# Altium PCB vehicle.PcbDoc
Units mm, origin at the board's own origin, x right, y up, seen from the top; angles counter-clockwise.
Board outline 152.4 x 101.6 mm, 2 copper layers (Top Layer, Bottom Layer); 26 components, 32 nets, 144 pads, 21 vias.
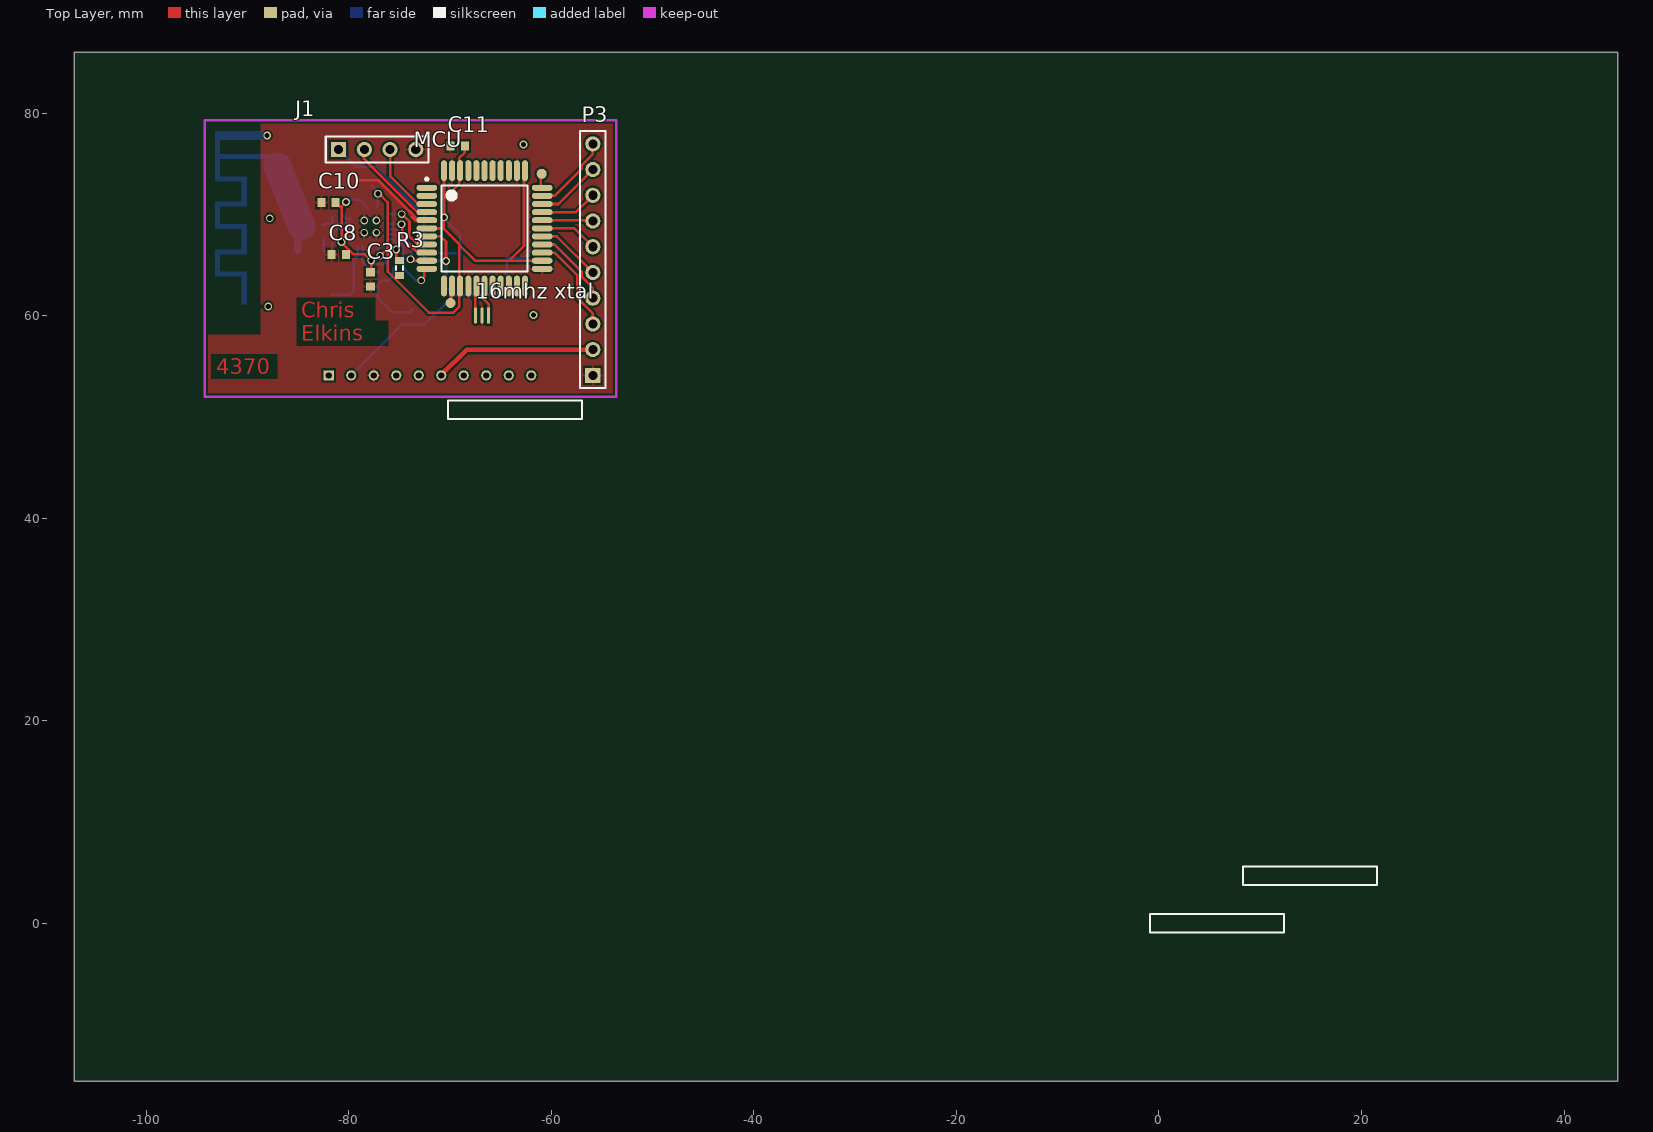
[diagram p0: Top Layer view]
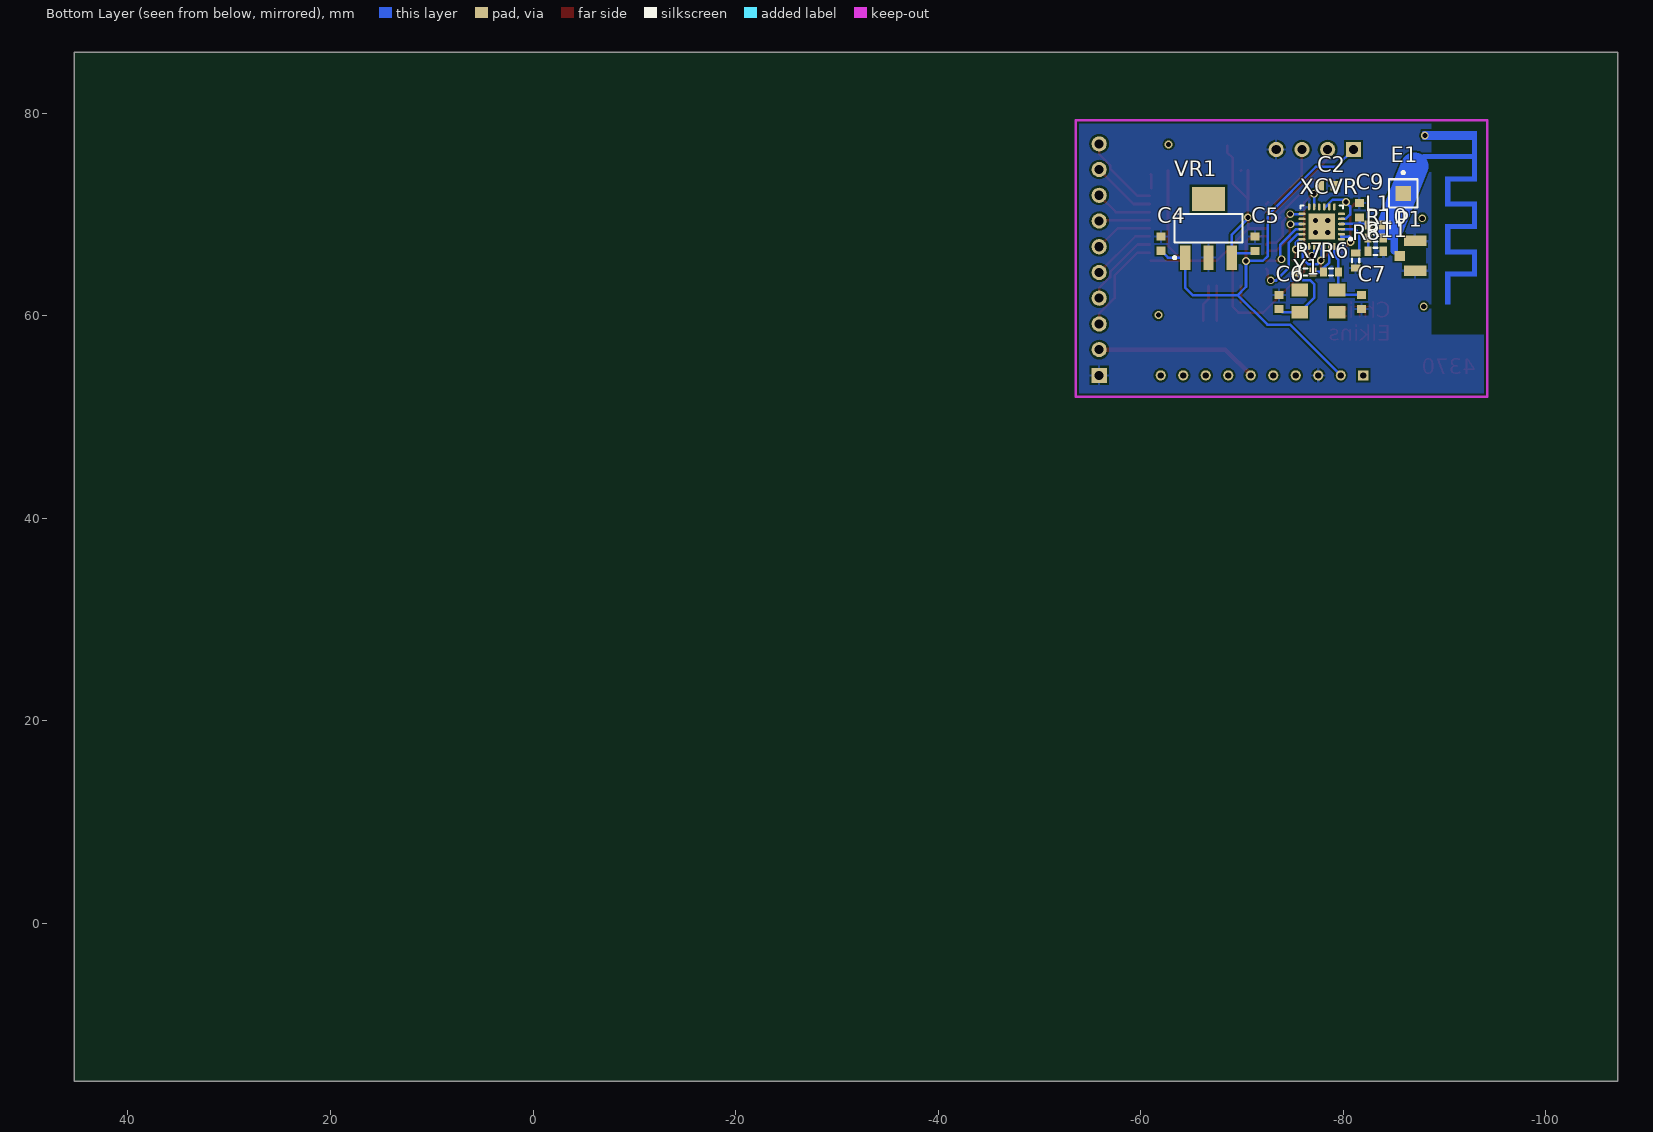
[diagram p1: Bottom Layer view, seen from below]

## Layer stack, top to bottom
Top Layer: signal copper 0.0356
Dielectric: dielectric 0.32, FR-4, Dk 4.8
Bottom Layer: signal copper 0.0356

## Board outline
-107.1,-15.6 45.3,-15.6 45.3,86 -107.1,86

## Design rules (kind name [scope] priority, off if disabled: settings)
Clearance [All] p1: gap=0.2
PolygonConnect [All] p1: connectstyle=Relief reliefconductorwidth=0.254 reliefentries=4 polygonreliefangle="90 Angle"
RoomDefinition vehicle [InComponentClass('vehicle')] p1: confinementstyle=ConfineOut formatcopy=TRUE lockcomponents=FALSE outline 51,-11 55,-11 55,6 51,6
RoutingVias [All] p1: holewidth=0.711 width=1.27 viastyle="Through Hole" minholewidth=0.711 minwidth=1.27 maxholewidth=0.711 maxwidth=1.27
SilkscreenOverComponentPads [All] p1: minsilkscreentomaskgap=0.254
SolderMaskExpansion [All] p1: expansion=0.102
Width [All] p1: maxlimit=5 minlimit=0.254 preferedwidth=0.254
27 further rules are at their usual default settings.

## Components (designator, comment, footprint, x,y, rotation, side; value= is the part's Value field where it differs from the comment)
"16mhz xtal" "NCSTCE16M0V53-R0" OSC -66.188,60 r180 top
C2 "Cap Semi" CAPC1608L -78.42,72.82 r0 bottom
C3 "Cap Semi" CAPC1608L -77.86,63.58 r90 top
C4 "Cap Semi" CAPC1608L -62,67.1 r270 bottom
C5 "Cap Semi" CAPC1608L -71.268,67.096 r270 bottom
C6 "Cap Semi" CAPC1608L -73.668,61.342 r270 bottom
C7 "Cap Semi" CAPC1608L -81.796,61.342 r90 bottom
C8 "Cap Semi" CAPC1608L -80.988,66.03 r0 top
C9 "Cap Semi" CAPC1608L -81.6,70.4 r90 bottom
C10 "Cap Semi" CAPC1608L -81.99,71.16 r180 top
C11 "Cap Semi" CAPC1608L -69.236,76.748 r180 top
E1 "Antenna" PIN1 -85.922,72.065 r180 bottom
J1 "5000750517" HDR1X4 -81,76.4 r0 top
L1 "Inductor" INDC1608L -83.2,68.95 r0 bottom
MCU "ATMega32u4" TQFP44_M -66.596,68.62 r0 top
P1 "u.fl" "U.FL connector" -87.1,65.9 r270 bottom
P3 "Header 10" HDR1X10 -55.9,54.1 r90 top
R3 "Res3" RESC1608L -75,64.7 r270 top
R6 "Res3" RESC1608L -78.798,64.308 r180 bottom
R7 "Res3" RESC1608L -76.258,64.308 r180 bottom
R8 "Res3" RESC1608L -81.23,65.44 r90 bottom
R10 "Res3" RESC1608L -83.2,67.65 r180 bottom
R11 "Res3" RESC1608L -83.2,66.35 r180 bottom
VR1 "NCP1117ST33T3G" SOT223-4N -66.696,68.62 r90 bottom
XCVR "CYRF8935" QFN50P400X400-24VAL -77.872,68.794 r0 bottom
Y1 "XTAL" PCBComponent_1 -75.7,60.326 r180 bottom

## Footprints (in the part's own frame and the unit in brackets; to place one, negate y for a bottom-side part, rotate by r counter-clockwise, add the part's x,y. Pads: shape width x height; smd on the part's side, far side on the other; paste and mask are expansions set on the pad)
CAPC1608L [mm] "Chip Capacitor, Body 1.6x0.8mm, IPC High Density"
  rect 0.8x0.9 smd: 1(-0.7,0) 2(0.7,0)
  body extent -0.87,-0.48 0.87,0.48, height 1.3
HDR1X4 [mm] "Connector; Header; 4 Position"
  rect 1.5x1.5 hole 0.9: 1(0,0)
  round 1.5 hole 0.9: 2(2.54,0) 3(5.08,0) 4(7.62,0)
  silkscreen extent -1.27,-1.27 8.89,1.27
HDR1X10 [mm] "Connector; Header; 10 Position"
  rect 1.5x1.5 hole 0.9: 1(0,0)
  round 1.5 hole 0.9: 2(2.54,0) 3(5.08,0) 4(7.62,0) 5(10.16,0) 6(12.7,0) 7(15.24,0) 8(17.78,0) 9(20.32,0) 10(22.86,0)
  silkscreen extent -1.27,-1.27 24.13,1.27
INDC1608L [mm] "Chip Inductor, Body 1.6x0.8mm, IPC High Density"
  rect 0.8x0.9 smd: 1(-0.7,0) 2(0.7,0)
  silkscreen extent -1.4,-0.35 -1.4,0.35, body extent -0.87,-0.48 0.87,0.48, height 0.55
OSC [mm]
  rect 0.3x1.6 smd: 1(0,0)
  oval 0.3x1.6 smd: 2(0.65,0) 3(1.3,0)
PCBComponent_1 [mm]
  rect 1.6x1.25 smd: 1(0,0) 2(3.7,2.2) 3(0,2.2) 3(3.7,0)
PIN1 [mm] "Generic Antenna; 1 Lead"
  rect 1.5x1.5 smd: 1(0,0)
  silkscreen extent -1.4,-1.4 1.4,2.17
QFN50P400X400-24VAL [mm] "24-Pin Plastic Quad Flat No-Lead 0.5 mm Pitch"
  oval 0.7x0.25 smd: 1(-1.95,1.25) 2(-1.95,0.75) 3(-1.95,0.25) 4(-1.95,-0.25) 5(-1.95,-0.75) 6(-1.95,-1.25) 13(1.95,-1.25) 14(1.95,-0.75) 15(1.95,-0.25) 16(1.95,0.25) 17(1.95,0.75) 18(1.95,1.25)
  oval 0.25x0.7 smd: 7(-1.25,-1.95) 8(-0.75,-1.95) 9(-0.25,-1.95) 10(0.25,-1.95) 11(0.75,-1.95) 12(1.25,-1.95) 19(1.25,1.95) 20(0.75,1.95) 21(0.25,1.95) 22(-0.25,1.95) 23(-0.75,1.95) 24(-1.25,1.95)
  rect 2.6x2.6 smd: 25(0,0)
  silkscreen extent -2.97,-2.1 2.1,2.1, body extent -2.07,-2.07 2.07,2.07, height 1
RESC1608L [mm] "Chip Resistor, Body 1.6x0.8mm, IPC High Density"
  rect 0.7x0.9 smd: 1(-0.75,0) 2(0.75,0)
  silkscreen extent -0.2,-0.35 0.2,0.35, body extent -0.85,-0.48 0.85,0.48, height 0.9
SOT223-4N [mm] "SOT223, 4-Leads, Body 6.5x3.5mm, Pitch 2.3mm, Lead Span 7mm, IPC Medium Density"
  rect 2.4x1 smd: 1(-2.9,2.3) 2(-2.9,0) 3(-2.9,-2.3)
  rect 2.4x3.3 smd: 4(2.9,0)
  silkscreen extent -3.02,-3.35 1.4,3.48, body extent -1.85,-3.35 1.85,3.35, height 1.7
TQFP44_M [mm] "Thin QFP, 44-Leads, Body 10x10mm, Pitch 0.8mm, IPC Low Density"
  oval 2.05x0.6 smd: 1(-5.7,4) 2(-5.7,3.2) 3(-5.7,2.4) 4(-5.7,1.6) 5(-5.7,0.8) 6(-5.7,0) 7(-5.7,-0.8) 8(-5.7,-1.6) 9(-5.7,-2.4) 10(-5.7,-3.2) 11(-5.7,-4) 23(5.7,-4) 24(5.7,-3.2) 25(5.7,-2.4) 26(5.7,-1.6) 27(5.7,-0.8) 28(5.7,0) 29(5.7,0.8) 30(5.7,1.6) 31(5.7,2.4) 32(5.7,3.2) 33(5.7,4)
  oval 0.6x2.05 smd: 12(-4,-5.7) 13(-3.2,-5.7) 14(-2.4,-5.7) 15(-1.6,-5.7) 16(-0.8,-5.7) 17(0,-5.7) 18(0.8,-5.7) 19(1.6,-5.7) 20(2.4,-5.7) 21(3.2,-5.7) 22(4,-5.7) 34(4,5.7) 35(3.2,5.7) 36(2.4,5.7) 37(1.6,5.7) 38(0.8,5.7) 39(0,5.7) 40(-0.8,5.7) 41(-1.6,5.7) 42(-2.4,5.7) 43(-3.2,5.7) 44(-4,5.7)
  silkscreen extent -5.82,-4.25 4.25,4.97, body extent -5,-5 5,5, height 1.6
"U.FL connector" [mm] "u.fl smd connector"
  rect 1x1.05 smd: 1(0,-1.525)
  rect 1.05x2.2 smd: 2(-1.475,0) 2(1.475,0)

## Part data
C2 C3 C4 C5 C6 C7 C8 C9 C10 C11: "Capacitor (Semiconductor SIM Model)"
E1: "Generic Antenna"
J1: "USB On-The-Go (OTG) Mini-B Receptacle, Right Angle, Thru-Hole, 0.80mm (.031\") Pitch, Solder Tails & Shell Tabs with Dimples"
MCU: "usb enabled avr microcontroller"
P1: library part BNC, "BNC Elbow Connector"
P3: "Header, 10-Pin"
R3 R6 R7 R8 R10 R11: "Resistor"
VR1: library part "Volt Reg", "Voltage Regulator"
Y1: "Crystal Oscillator"

## Free pads (board coordinates)
  rect 1x1 hole 0.6: 1(-81.978,54.1)
  round 1 smd: 1(-69.95,61.25) 1(-60.95,74)
  round 1 hole 0.6: 2(-79.756,54.1) 3(-77.533,54.1) 4(-75.311,54.1) 5(-73.089,54.1) 6(-70.867,54.1) 7(-68.644,54.1) 8(-66.422,54.1) 9(-64.2,54.1) 10(-61.978,54.1)

## Via types
v1: diameter 0.762, hole 0.508, Top Layer to Bottom Layer, 17 vias
v2: diameter 0.762, hole 0.508, Top Layer to Bottom Layer, tented top, 4 vias

## Nets (pads, with @x,y where several pads share a name; then routed paths per layer and width w, separated by ;. In a path a pad name is that pad's centre, name@x,y a point inside that pad or via, vN(x,y) a via of type N, cw(c..) or ccw(c..) an arc to the next point about the centre after c; other vN are vias at no path point)
GND: "16mhz xtal.2" C2.1 C3.1 C4.1 C5.1 C6.1 C7.1 C8.1 C9.2 C10.2 C11.2 J1.4 MCU.5 MCU.15 MCU.23 MCU.35 MCU.43 P1.2 P3.1 pad.3 R8.1 R11.2 VR1.2 XCVR.12 XCVR.25 | length 10
  Top Layer w0.254: -78.96,73.35 -77.04,73.35 -74.387,70.697 -74.387,70.639 -74.062,70.313 -73.983,70.313 -73.648,69.978 -73.648,69.96 -73.088,69.4 MCU.5@-72.46,69.4 ; -73.77,69.73 -73.41,69.37 MCU.5@-73.14,69.37 ; -73.281,69.593 -72.569,69.593 MCU.5@-72.396,69.42 ; MCU.43@-69.936,74.36 MCU.43@-69.896,74.32
  other v2: -78.472,68.194 -77.272,68.194 -78.472,69.394 -77.272,69.394
"Net16mhz xtal_1": "16mhz xtal.1" MCU.17 | length 3.7
  Top Layer w0.254: MCU.17@-66.696,62.92 -66.696,61.646 -66.188,61.138 -66.188,59.476
"Net16mhz xtal_3": "16mhz xtal.3" MCU.16 | length 3.4
  Top Layer w0.254: -67.496,59.484 MCU.16@-67.496,62.92
NetC6_2: C6.2 R7.1 Y1.1 | length 8.2
  Bottom Layer w0.254: R7.1@-75.552,64.698 -75.552,64.448 -75.6,64.4 -75.6,63.9 -76,63.5 -76.7,63.5 -77.15,63.05 -77.15,61.776 Y1.1 -73.984,60.326 C6.2
NetC7_2: C7.2 R6.2 XCVR.24 Y1.2 | length 7
  Bottom Layer w0.254: C7.2 -79.884,62.042 -79.498,62.428 -79.498,64.698 -79.498,65.552 -79.122,65.928 XCVR.24
NetC9_1: C9.1 L1.2 XCVR.4 | length 3.3
  Bottom Layer w0.254: L1.2 -82.4,69.05 XCVR.4@-79.828,69.05 ; -81.65,69.148 C9.1@-81.65,69.75
NetE1_1: E1.1 L1.1 P1.1 R10.2 | length 9.8
  Bottom Layer w0.254: R10.2@-83.9,67.7 L1.1
  Bottom Layer w0.754: -85.05,66.4 -85.05,68.6
  Bottom Layer w2.743: -87.032,74.739 -84.66,68.83
NetJ1_2: J1.2 MCU.4 | length 9.7
  Top Layer w0.254: J1.2@-78.5,76.7 -78.5,75.5 -77.643,74.643 -77.643,74.623 -73.941,70.921 -73.941,70.911 ; -73.91,70.89 MCU.4@-73.077,70.057 ; MCU.4@-73.108,70.078 MCU.4@-73.108,70.22 ; MCU.4@-73.057,70.22 MCU.4@-72.396,70.22
NetJ1_3: J1.3 MCU.3 | length 6.7
  Top Layer w0.254: J1.3@-75.9,76.4 -75.9,73.73 MCU.3@-73.23,71.06 ; MCU.3@-72.569,71.193 MCU.3@-72.396,71.02
NetMCU_8: MCU.8 XCVR.13 | length 5.7
  Top Layer w0.254: v1@-74.765,70.035 -74.004,69.274 -74.004,68.554 -74.01,68.548 -74.01,67.822 -73.381,67.193 -72.569,67.193 MCU.8@-72.396,67.02
  Bottom Layer w0.254: XCVR.13@-75.98,70.02 v1(-74.77,70.02)
NetMCU_9: MCU.9 XCVR.15 | length 5.4
  Top Layer w0.254: v1@-74.7,68.95 -74.7,67.712 -73.381,66.393 -72.569,66.393 MCU.9@-72.396,66.22
  Bottom Layer w0.254: XCVR.15 -74.794,69.044 v1@-74.7,68.95
  other v1: -74.8,69.02
NetMCU_10: MCU.10 XCVR.16 | length 6.6
  Top Layer w0.254: v1(-73.892,65.562) -73.958,65.562 -73.958,65.39 -73.81,65.39 -73.8,65.4 MCU.10@-72.416,65.4
  Bottom Layer w0.254: XCVR.16 -75.334,68.544 -73.8,67.01 -73.8,65.4 -73.81,65.39 -73.958,65.39 -73.958,65.562 v1(-73.892,65.562)
NetMCU_11: MCU.11 XCVR.17 | length 7.7
  Top Layer w0.254: v1@-72.87,63.47 -72.54,63.8 -72.54,64.476 MCU.11@-72.396,64.62
  Bottom Layer w0.254: XCVR.17 -75.484,68.044 -74.6,67.16 -74.6,64.7 -73.37,63.47 v1@-72.9,63.47
  other v1: -72.84,63.48
NetMCU_25: MCU.25 P3.3 | length 9.8
  Top Layer w0.254: MCU.25 -59.7,66.22 -57.431,63.951 -57.431,61.728 -55.9,60.197 P3.3
NetMCU_26: MCU.26 P3.4 | length 8.1
  Top Layer w0.254: MCU.26 -59.7,67.02 -56.977,64.297 -56.977,63.814 -55.9,62.737 P3.4
NetMCU_27: MCU.27 P3.5 | length 6.5
  Top Layer w0.254: MCU.27 -59.46,67.82 P3.5
NetMCU_28: MCU.28 P3.6 | length 5.7
  Top Layer w0.254: MCU.28 -57.72,68.62 P3.6
NetMCU_29: MCU.29 P3.7 | length 5
  Top Layer w0.254: MCU.29 -55.98,69.42 P3.7
NetMCU_30: MCU.30 P3.8 | length 5.7
  Top Layer w0.254: MCU.30 -57.56,70.22 P3.8
NetMCU_31: MCU.31 P3.9 | length 6.4
  Top Layer w0.254: MCU.31 -59.3,71.02 P3.9
NetMCU_32: MCU.32 P3.10 | length 7.9
  Top Layer w0.254: MCU.32 -59.7,71.82 -56.977,74.543 -56.977,74.866 -55.9,75.943 P3.10
NetP2_1: pad.1@-81.978,54.1
NetR3_1: R3.1 XCVR.18 | length 2.6
  Top Layer w0.254: v1@-75.3,66.51 -75.3,65.75 R3.1
  Bottom Layer w0.254: XCVR.18 -75.694,67.544 -75.3,67.15 -75.32,67.13 v1(-75.32,66.52)
NetR6_1: R6.1 R7.2 XCVR.23 | length 3.5
  Bottom Layer w0.254: XCVR.23 -78.622,65.262 -78.058,64.698 R6.1@-77.998,64.698 ; R6.1 R7.2
NetR8_2: R8.2 XCVR.3 | length 3.9
  Bottom Layer w0.254: R8.2@-81.37,66.2 -81.56,66.39 -81.56,68.13 -81.146,68.544 XCVR.3
NetR10_1: R10.1 R11.1 | length 1.3
  Bottom Layer w0.254: R11.1 R10.1
NewNet1: 
NewNet2: 
VBAT: P3.2 pad.6 | length 16.1
  Top Layer w0.454: pad.6@-70.9,54.1 -68.36,56.64 P3.2
VCC: C2.2 C5.2 C11.1 MCU.6 MCU.14 MCU.24 MCU.34 MCU.42 MCU.44 R3.2 VR1.3 XCVR.11 XCVR.20 | length 67
  Top Layer w0.254: v1@-77.03,72.05 -76.15,71.17 -76.15,64.35 -72.1,60.3 -69.65,60.3 -69.096,60.854 -69.096,67.056 -70.66,68.62 ; v1@-76.88,65.91 -76.135,66.655 ; MCU.6@-72.396,68.62 -72.376,68.6 -70.61,68.6 v1@-70.61,69.614 ; -70.596,71.51 MCU.44@-70.596,74.34 ; v1@-70.59,69.806 -70.59,71.51 -69.096,73.004 -69.096,75.554 -68.536,76.114 C11.1 ; -69.096,66.996 -67.52,65.42 -64.15,65.42 ; MCU.34@-62.696,74.32 -62.696,66.874 -64.15,65.42 ; MCU.24@-60.996,65.42 -64.15,65.42
  Bottom Layer w0.254: C2.2 v1@-77.25,72.35 ; -77.13,71.42 v1@-77.13,71.88 ; v1@-77.122,66.072 XCVR.20 ; XCVR.11 -77.122,71.412 ; C5.2@-71.022,66.15 VR1.3@-69.426,66.15 ; v1@-70.696,69.7 -68.996,68 VR1.3
  other v1: -76.903,65.913 -70.58,69.7 -77.11,72.03
VDD: C3.2 C8.2 C10.1 XCVR.1 XCVR.2 XCVR.5 XCVR.8 XCVR.9 XCVR.19 XCVR.21 XCVR.22 | length 22.2
  Top Layer w0.254: C10.1@-81.11,71.03 -80.71,70.63 -80.71,67.21 -79.55,66.05 -78.43,66.05 -77.78,65.42 C3.2@-77.78,64.26 ; -80.74,70.74 v1(-80.27,71.21) ; C8.2 C8.2@-79.909,66.409
  Bottom Layer w0.254: -79.85,67.8 -79.822,67.772 XCVR.2 ; XCVR.5 -80.244,69.544 -80.68,69.98 -80.68,70.77 -80,71.45 -78.964,71.45 XCVR.9@-78.132,70.618 ; XCVR.22 -77.87,66.844 ; -77.87,66.85 -77.87,66.844 ; -77.85,66.85 -77.856,66.844 -77.87,66.844 ; v1@-77.79,65.38 -77.87,65.46 -77.87,66.844 ; v1@-77.73,65.44 -77.73,65.35 -77.465,65.085 -76.534,65.085 -76.002,65.617 -76.002,66.201 -76.028,66.227 -76.028,66.229 -76.417,66.618 -76.567,66.618 -76.5,66.685 -76.5,66.722 XCVR.19
  Bottom Layer w0.264: v1(-80.71,67.26) -80.71,67.69 -80.58,67.82 ; -80.6,67.8 -79.85,67.8
  other v1: -77.79,65.44
VUSB: C4.2 J1.1 MCU.7 pad.2 VR1.1 | length 49.9
  Top Layer w0.254: MCU.7@-72.396,67.82 MCU.7 -70.92,67.82 -70.4,67.3 v1(-70.4,65.4)
  Bottom Layer w0.254: J1.1 -79.3,74.7 -77.3,74.7 -72.55,69.95 -72.55,65.9 -72.05,65.4 v1(-70.4,65.4) -70.4,62.85 -69.55,62 -65.15,62 -64.396,62.754 VR1.1 -62.68,65.72 C4.2 ; pad.2 -74.756,59.1 -72.5,59.1 -69.6,62
pads on no net: MCU.1 MCU.2 MCU.12 MCU.13 MCU.18 MCU.19 MCU.20 MCU.21 MCU.22 MCU.33 MCU.36 MCU.37 MCU.38 MCU.39 MCU.40 MCU.41 VR1.4 XCVR.6 XCVR.7 XCVR.10 XCVR.14 Y1.3
copper on no net: | length 3
  Top Layer w0.254: -69.9,61.3 -69.9,62.95 ; -61.05,72.6 -61.05,73.9 -61,73.95
  other v1: -61.75,60.05 -87.95,60.9 -87.8,69.6 -62.75,76.9 -88.06,77.78

## Polygon pours and split planes (outlines as drawn)
GND on Bottom Layer "Top Layer-No Net" (solid, remove dead copper, pour order 1000): -48.4,80.49 -48.4,51.198 -49.774,49.776 -49.848,49.7 -96.56,49.7 -96.56,79.703 -95.873,80.414
GND on Top Layer "Top Layer-No Net" (solid, remove dead copper, pour order 1001): -47.8,43.4 -49.667,45.773 -49.667,80.47 -93.905,80.47 -95.59,78.328 -94.523,76.973 -94.523,44.679

## Keep-outs
Keep-Out Layer:
  lines w0.254: -94.2,52 -94.2,79.3 -53.6,79.3 -53.6,52 -94.2,52

## Other copper
Top Layer:
  text "Chris" at -84.7,59.8 h1.52
  text "Elkins" at -84.7,57.5 h1.52
  text "4370" at -93.1,54.2 h1.52
Bottom Layer:
  region net NetE1_1: -93.21,66.55 -93.21,63.85 -92.71,63.85 -92.71,66.55
  region net NetE1_1: -93.21,71.25 -93.21,68.55 -92.71,68.55 -92.71,71.25
  region net NetE1_1: -92.93,69.05 -92.93,68.55 -90.07,68.55 -90.07,69.05
  region net NetE1_1: -93.04,71.25 -93.04,70.75 -90.07,70.75 -90.07,71.25
  region net NetE1_1: -92.86,66.55 -92.86,66.05 -90.07,66.05 -90.07,66.55
  region net NetE1_1: -90.57,68.75 -90.57,66.35 -90.07,66.35 -90.07,68.75
  region net NetE1_1: -90.57,73.52 -90.57,71.02 -90.07,71.02 -90.07,73.52
  region net NetE1_1: -92.9,73.75 -92.9,73.25 -90.07,73.25 -90.07,73.75
  region net NetE1_1: -93.21,78.25 -93.21,73.25 -92.71,73.25 -92.71,78.25
  region net NetE1_1: -92.78,78.25 -92.78,77.35 -87.81,77.35 -87.81,78.25
  region net NetE1_1: -92.92,75.95 -92.92,75.45 -87.81,75.45 -87.81,75.95
  region net NetE1_1: -92.94,64.35 -92.94,63.85 -90.07,63.85 -90.07,64.35
  region net NetE1_1: -90.57,64.07 -90.57,61.09 -90.07,61.09 -90.07,64.07
  pour cut-out: -88.2,64.4 -88.2,67.4 -86,67.4 -86,64.4
Multi-Layer:
  pour cut-out: -88.7,79.15 -88.7,58.1 -94.2,58.1 -94.2,79.15

## Silkscreen, mask and mechanical layers (free items; w line width, h text height)
Top Overlay:
  lines w0.2: -70.2,49.8 -70.2,51.6 -56.97,51.6 -56.97,49.8 -70.2,49.8 ; -0.9,-0.9 12.33,-0.9 12.33,0.9 -0.9,0.9 -0.9,-0.9 ; 8.3,3.8 21.53,3.8 21.53,5.6 8.3,5.6 8.3,3.8
Top Solder:
  circle w0.254: c-69.95,59.25 r0.5
  circle w0.254: c-69.95,59.25 r0.255
  circle w0.254: c-69.95,59.25 r0.05
  circle w0.254: c-60.95,75.6 r0.5
  circle w0.254: c-60.95,75.6 r0.25
  circle w0.254: c-60.95,75.6 r0.05